# Altium PCB 2m_DBoard.PcbDoc
Units mil, origin at the board's own origin, x right, y up, seen from the top; angles counter-clockwise.
Board outline 2505 x 2750 mil, 2 copper layers (Top Layer, Bottom Layer); 23 components, 66 nets, 208 pads, 16 vias.
Unrouted connection lines stored in the file: 72.
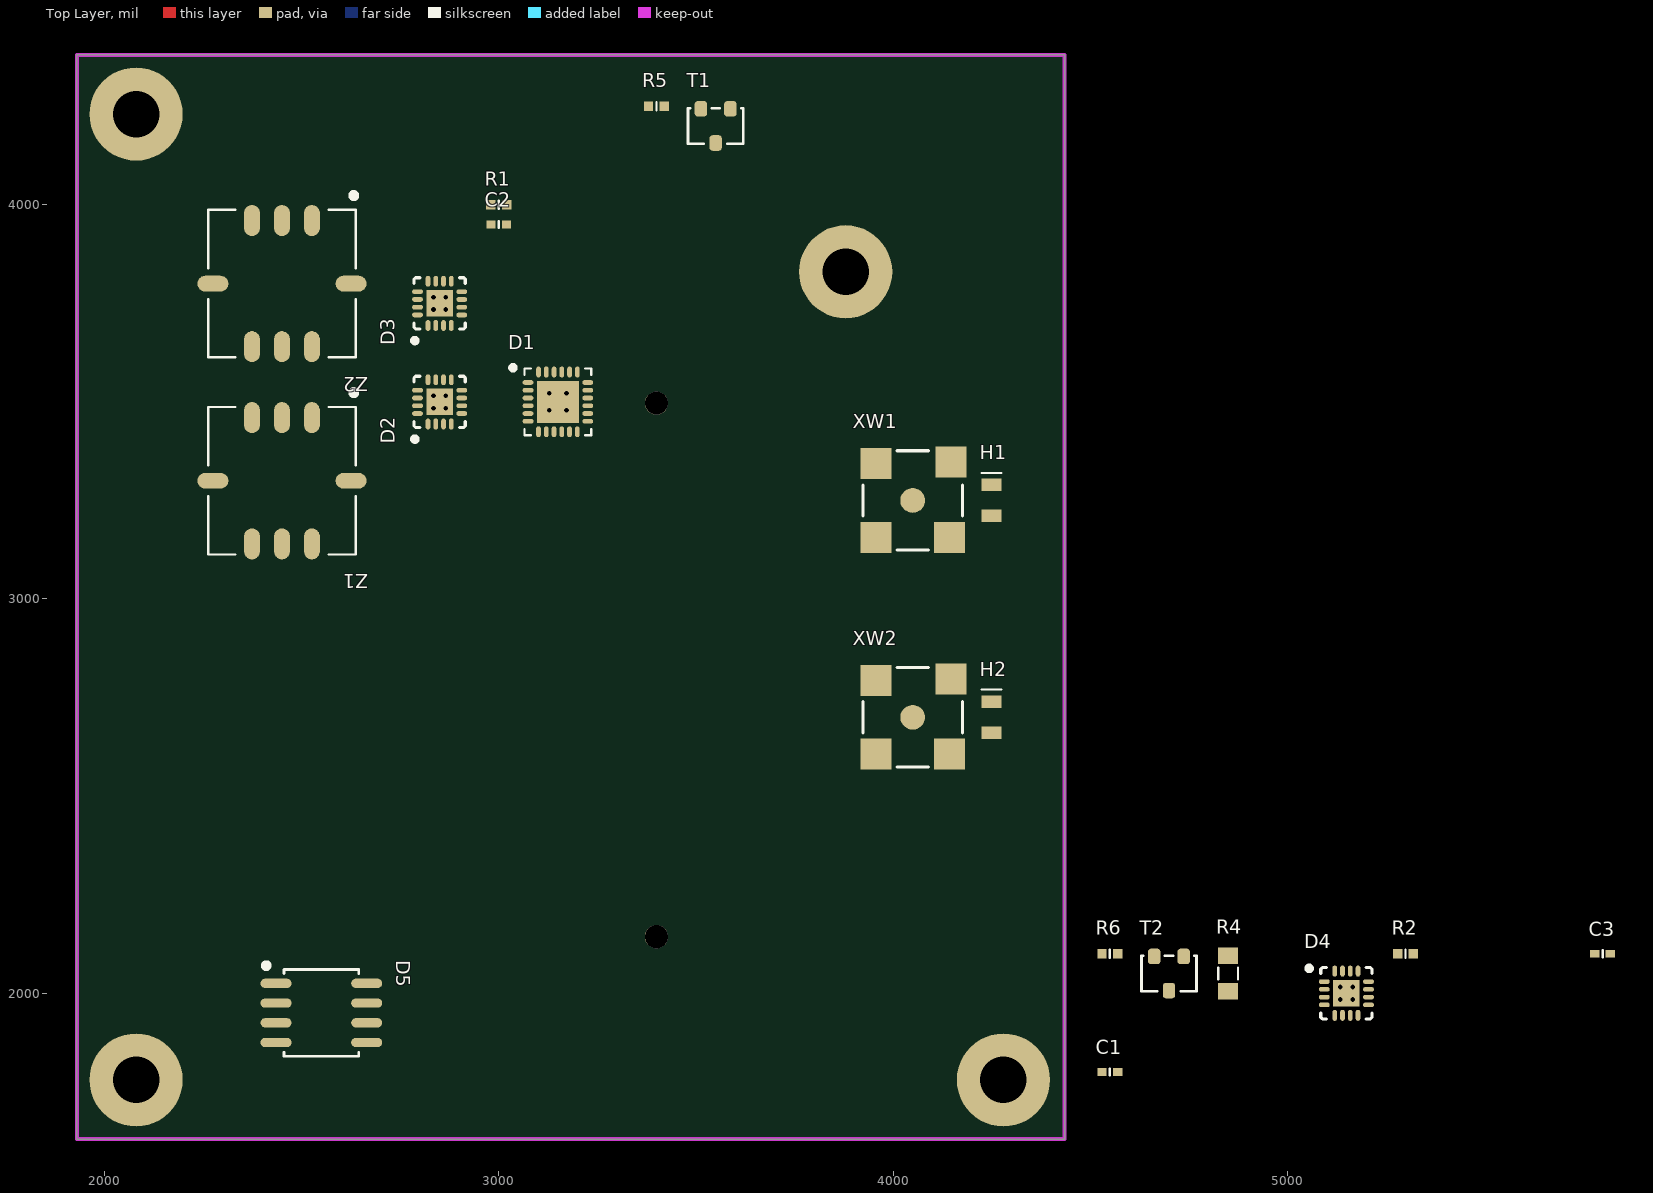
[diagram p0: Top Layer view]
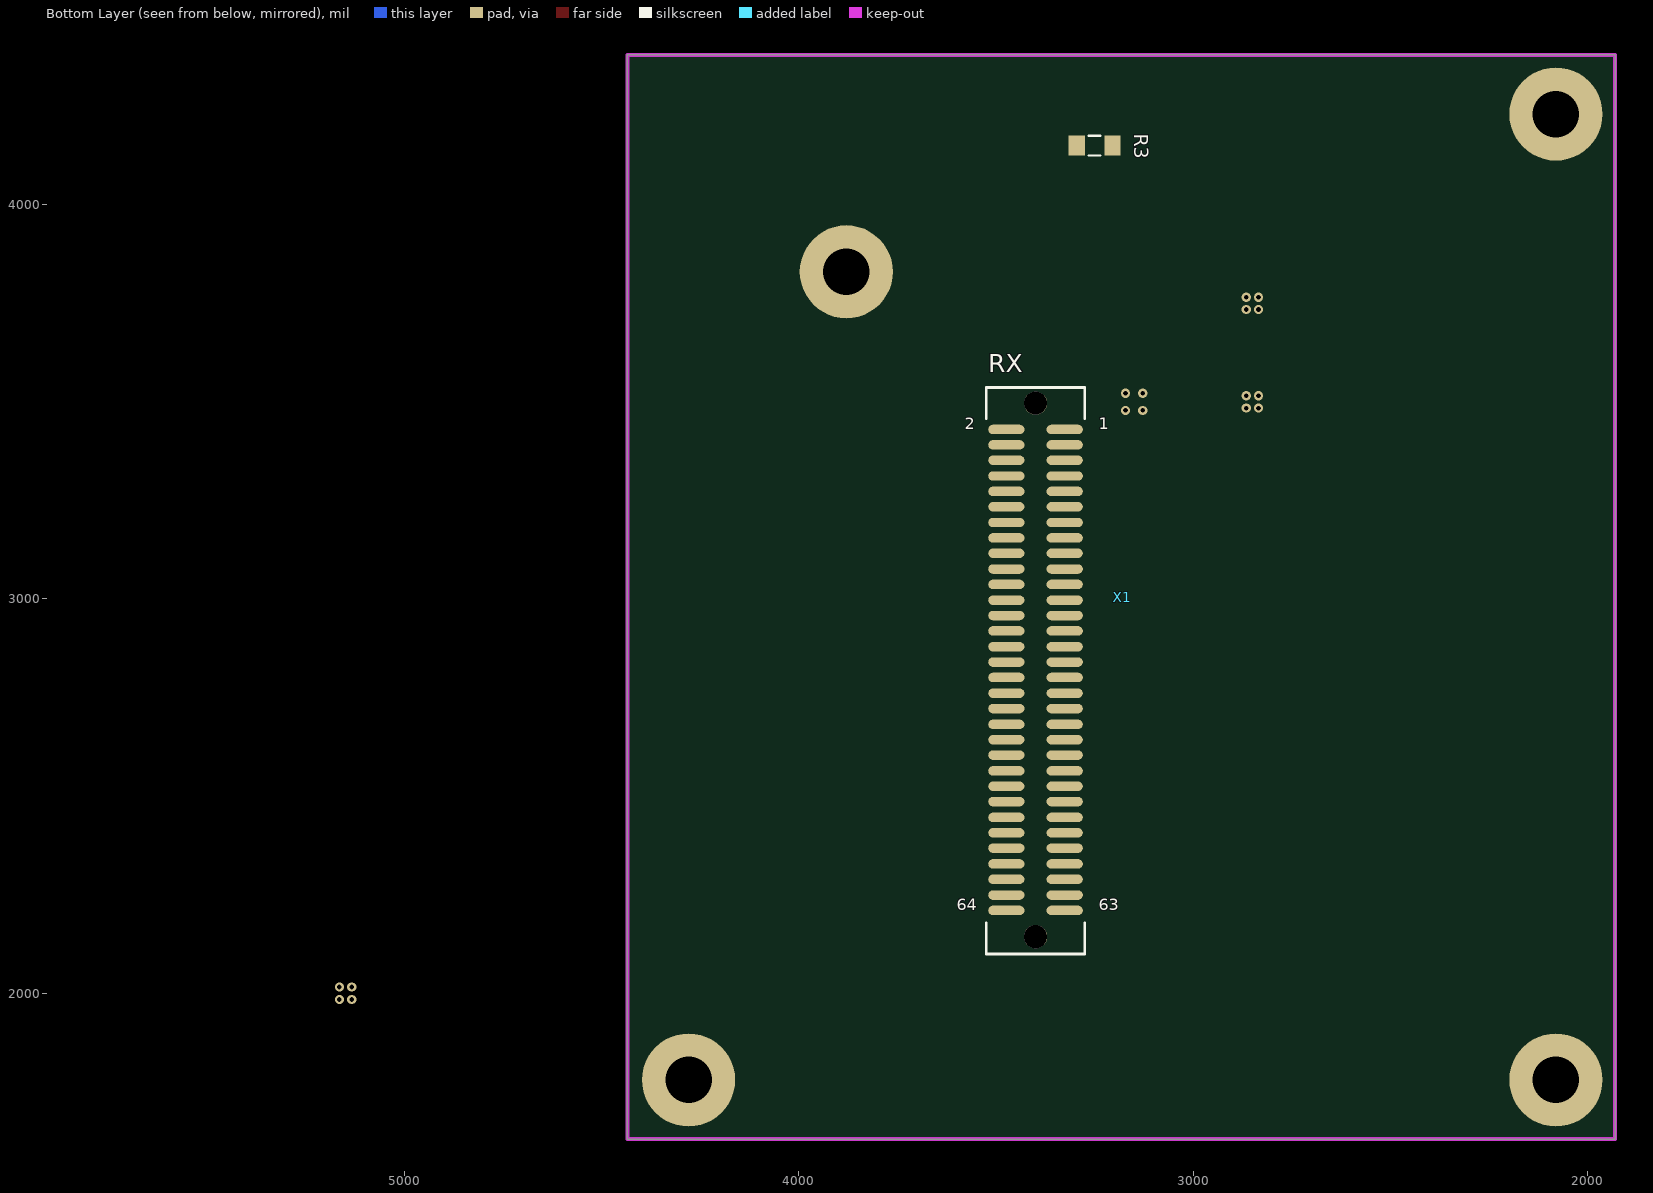
[diagram p1: Bottom Layer view, seen from below]

## Layer stack, top to bottom
Top Solder: solder mask 0.4, Solder Resist, Dk 3.5
Top Layer: signal copper 1.4
Dielectric 1: dielectric 12.6, FR-4, Dk 4.8
Bottom Layer: signal copper 1.4
Bottom Solder: solder mask 0.4, Solder Resist, Dk 3.5

## Board outline
1930,1630 4435,1630 4435,4380 1930,4380

## Design rules (kind name [scope] priority, off if disabled: settings)
Clearance [All] p1: gap=10 ignorepadtopadclearanceinfootprint=FALSE except(0: Arc-Hole Track-Hole SMDPad-Hole THPad-Hole Via-Hole Fill-Hole Poly-Hole Region-Hole Text-Hole)
DiffPairsRouting [All] p1: maxlimit=10 minlimit=10 mostfreqgap=10 toplayer_minwidth=15 toplayer_maxwidth=15 toplayer_prefwidth=15 bottomlayer_minwidth=15 bottomlayer_maxwidth=15 bottomlayer_prefwidth=15 maxuncoupledlength=500
PolygonConnect [All] p1: connectstyle=Relief reliefconductorwidth=10 reliefentries=4 polygonreliefangle="90 Angle" airgapwidth=10
RoutingVias [All] p1: holewidth=28 width=50 viastyle="Through Hole" minholewidth=28 minwidth=50 maxholewidth=28 maxwidth=50
SolderMaskExpansion [All] p1: expansion=4 istentingtop=FALSE
Width [All] p1: maxlimit=10 minlimit=10 preferedwidth=10
29 further rules are at their usual default settings.

## Classes and differential pairs
differential pair VINB: +VINB_P -VINB_N
differential pair VINA: +VINA_P -VINA_N

## Components (designator, comment, footprint, x,y, rotation, side; value= is the part's Value field where it differs from the comment)
C1 "CAP" C0402 4550,1800 r0 top
C2 "CAP" C0402 3000,3950 r0 top
C3 "CAP" C0402 5800,2100 r0 top
D1 "PE43711" QFN-24 3150,3500 r0 top
D2 "PE42553" QFN-16 2850,3500 r90 top
D3 "PE42553" QFN-16 2850,3750 r90 top
D4 "PE42553" QFN-16 5150,2000 r0 top
D5 "24LC024" SOIC_SN8 2550,1950 r0 top
H1 "RX" LED 4250,3250 r0 top
H2 "TX" LED 4250,2700 r0 top
R1 "RES" R0402 3000,4000 r0 top
R2 "RES" R0402 5300,2100 r0 top
R3 "RES" R0805 3250,4150 r180 bottom
R4 "RES" R0805 4850,2050 r90 top
R5 "RES" R0402 3400,4250 r0 top
R6 "RES" R0402 4550,2100 r0 top
T1 "2N7002" SOT-23 3550,4200 r0 top
T2 "2N7002" SOT-23 4700,2050 r0 top
X1 "DBoard" DBoard 3400,2800 r180 bottom locked
XW1 "RX" "MOLEX SD-73251-135 (Gold)" 4050,3250 r0 top
XW2 "RX2" "MOLEX SD-73251-135 (Gold)" 4050,2700 r0 top
Z1 "RBP-135+" GP731 2450,3300 r180 top
Z2 "RBP-140+" GP731 2450,3800 r180 top

## Footprints (in the part's own frame and the unit in brackets; to place one, negate y for a bottom-side part, rotate by r counter-clockwise, add the part's x,y. Pads: shape width x height; smd on the part's side, far side on the other; paste and mask are expansions set on the pad)
C0402 [mm] "Chip Capacitor, Body 1.0x0.5mm, IPC High Density"
  rect 0.6x0.5 smd: 1(-0.5,0) 2(0.5,0)
  silkscreen extent 0,-0.23 0,0.23, body extent -0.5,-0.25 0.5,0.25, height 0.49
DBoard [mil] "USRP DBoard"
  round 236.22 hole 118.11: 0(-880,-1020) 0(-480,1030) 0(1320,-1020) 0(1320,1430)
  round 59.06 hole 59.06 unplated: 0(0,-657) 0(0,697)
  oval 92x24 smd: 65(74,630) 66(-74,630) 67(74,591) 68(-74,591) 69(74,552) 70(-74,552) 71(74,512) 72(-74,512) 73(74,473) 74(-74,473) 75(74,434) 76(-74,434) 77(74,394) 78(-74,394) 79(74,355) 80(-74,355) 81(74,316) 82(-74,316) 83(74,276) 84(-74,276) 85(74,237) 86(-74,237) 87(74,197) 88(-74,197) 89(74,158) 90(-74,158) 91(74,119) 92(-74,119) 93(74,79) 94(-74,79) 95(74,40) 96(-74,40) 97(74,1) 98(-74,1) 99(74,-39) 100(-74,-39) 101(74,-78) 102(-74,-78) 103(74,-118) 104(-74,-118) 105(74,-157) 106(-74,-157) 107(74,-196) 108(-74,-196) 109(74,-236) 110(-74,-236) 111(74,-275) 112(-74,-275) 113(74,-314) 114(-74,-314) 115(74,-354) 116(-74,-354) 117(74,-393) 118(-74,-393) 119(74,-432) 120(-74,-432) 121(74,-472) 122(-74,-472) 123(74,-511) 124(-74,-511) 125(74,-551) 126(-74,-551) 127(74,-590) 128(-74,-590)
  silkscreen extent -125,-701 125,736, body extent -120,-687 120,727, height 209
GP731 [mm] "Low Pass Filter"
  oval 2x1.02 smd: GND(-4.451,0) GND(4.451,0)
  oval 1.02x2 smd: GND(-1.93,4.065) GND(-1.93,-4.065) GND(1.93,4.065) GND(1.93,-4.065) IN(0,-4.065) OUT(0,4.065)
  silkscreen extent -4.8,-5.85 4.75,4.75, body extent -4.45,-4.45 4.46,4.46, height 2.54
LED [mm] "2012"
  rect 1.3x0.8 smd: 1(0,1) 2(0,-1)
  silkscreen extent -0.64,1.78 0.64,1.78, body extent -0.62,-1 0.62,1, height 0.4
"MOLEX SD-73251-135 (Gold)" [mm]
  rect 2x2 smd: G(-2.375,-2.375) G(-2.375,2.375) G(2.375,-2.375) G(2.475,2.475)
  round 1.6 smd: S(0,0)
  silkscreen extent -3.2,-3.2 3.2,3.2, body extent -3.17,-3.17 3.18,3.18, height 9.52
QFN-16 [mm] "QFN, 16-Leads, Body 3,00x3,00mm, Pitch 0,50mm, Thermal Pad 1,70x1,70mm, IPC Medium Density"
  oval 0.7x0.3 smd: 1(-1.425,0.75) 2(-1.425,0.25) 3(-1.425,-0.25) 4(-1.425,-0.75) 9(1.425,-0.75) 10(1.425,-0.25) 11(1.425,0.25) 12(1.425,0.75)
  oval 0.3x0.7 smd: 5(-0.75,-1.425) 6(-0.25,-1.425) 7(0.25,-1.425) 8(0.75,-1.425) 13(0.75,1.425) 14(0.25,1.425) 15(-0.25,1.425) 16(-0.75,1.425)
  rect 1.7x1.7 smd: 17(0,0)
  silkscreen extent -2.53,-1.65 1.65,1.73, body extent -1.5,-1.5 1.5,1.5, height 0.92
QFN-24 [mm] "QFN, 24-Leads, Body 4,00x4,00mm, Pitch 0,50mm, Thermal Pad 2,70x2,70mm, IPC Medium Density"
  oval 0.7x0.3 smd: 1(-1.925,1.25) 2(-1.925,0.75) 3(-1.925,0.25) 4(-1.925,-0.25) 5(-1.925,-0.75) 6(-1.925,-1.25) 13(1.925,-1.25) 14(1.925,-0.75) 15(1.925,-0.25) 16(1.925,0.25) 17(1.925,0.75) 18(1.925,1.25)
  oval 0.3x0.7 smd: 7(-1.25,-1.925) 8(-0.75,-1.925) 9(-0.25,-1.925) 10(0.25,-1.925) 11(0.75,-1.925) 12(1.25,-1.925) 19(1.25,1.925) 20(0.75,1.925) 21(0.25,1.925) 22(-0.25,1.925) 23(-0.75,1.925) 24(-1.25,1.925)
  rect 2.7x2.7 smd: 25(0,0)
  silkscreen extent -3.03,-2.15 2.15,2.33, body extent -2,-2.01 2.01,2, height 0.9
R0402 [mil]
  rect 23.62x24 smd: 1(-20,0) 2(20,0)
  silkscreen extent 0,-10 0,10, body extent -20,-12 20,12, height 13
R0805 [mm]
  rect 1.05x1.3 smd: 1(-1.15,0) 2(1.15,0)
  silkscreen extent -0.38,-0.64 0.38,0.64, body extent -1.15,-0.67 1.15,0.68, height 0.76
SOIC_SN8 [mm]
  oval 2x0.6 smd: 1(-2.921,1.905) 2(-2.921,0.635) 3(-2.921,-0.635) 4(-2.921,-1.905) 5(2.921,-1.905) 6(2.921,-0.635) 7(2.921,0.635) 8(2.921,1.905)
  silkscreen extent -3.72,-2.79 2.41,3.22, body extent -3.1,-2.5 3.1,2.5, height 1.75
SOT-23 [mm]
  rrect50% 0.8x1 smd: 1(0.95,1.1) 2(-0.95,1.1) 3(0,-1.1)
  silkscreen extent -1.78,-1.14 1.78,1.14, body extent -1.5,-1.25 1.5,1.25, height 1.09

## Part data
C1 C2 C3: "SMD Capacitor"
D1: "The PE43711 is a 50?, HaRP™ technology-enhanced, 7-bit RF digital step attenuator"
D2 D3 D4: "HaRPTM technology-enhanced absorptive SPDT"
D5: "I2C EEPROM"
H1 H2: library part LED, "CHIP LED LAMP"
R1 R2 R3 R4 R5 R6: "SMD Resistor"
T1 T2: "N-Channel MOSFET 2N7002"
X1: "USRP DBoard"
XW1 XW2: library part "RF Connector", "50 Ohms, SMA Jack, Vertica"
Z1 Z2: "Bandpass Filter"

## Via types
v1: diameter 23.62, hole 11.81, Top Layer to Bottom Layer, 16 vias

## Nets (pads, with @x,y where several pads share a name; then routed paths per layer and width w, separated by ;. In a path a pad name is that pad's centre, name@x,y a point inside that pad or via, vN(x,y) a via of type N, cw(c..) or ccw(c..) an arc to the next point about the centre after c; other vN are vias at no path point)
3V3_DVDD: X1.71 X1.73 X1.85
5V_DVDD: D1.2 D2.16 D3.16 D4.16 H1.2 H2.2
6V_RX: X1.67 X1.69
20MHZ_BW: D2.2 Z1.IN
20MHZ_BW_FLTD: D3.2 Z1.OUT
30MHZ_BW: D2.11 Z2.IN
30MHZ_BW_FLTD: D3.11 Z2.OUT
_OUTA_RX: X1.117 X1.119
_OUTB_RX: X1.113 X1.115
_VIN0_RX: X1.125
_VIN1_RX: X1.123
AGND: D1.4 D1.6 D1.7 D1.8 D1.9 D1.10 D1.11 D1.12 D1.13 D1.15 D1.25 R1.2 R2.2 XW1.G XW2.G Z1.GND Z2.GND
  other v1: 3128.35,3478.35 3171.65,3478.35 3128.35,3521.65 3171.65,3521.65
AGND_RX: X1.105 X1.106 X1.111 X1.112 X1.118 X1.122 X1.127 X1.128
ATT_CLK: D1.17
ATT_D0: D1.1
ATT_D1: D1.24
ATT_D2: D1.23
ATT_D3: D1.22
ATT_D4: D1.21
ATT_D5: D1.20
ATT_D6: D1.19
ATT_LE: D1.16
ATT_P/S\: D1.3
ATT_SI: D1.18
AVDD_RX: X1.107 X1.108 X1.109 X1.110
CLOCK_RX_N: X1.75
CLOCK_RX_P: X1.77
GND: R5.2 R6.2 T1.2 T2.2 X1.65 X1.66 X1.68 X1.83 X1.101 X1.102
IF: C1.1 D4.7
IF_ATT: D1.14
IO_RX_00: X1.100
IO_RX_01: X1.98
IO_RX_02: X1.96
IO_RX_03: X1.94
IO_RX_04: X1.92
IO_RX_05: X1.90
IO_RX_06: X1.88
IO_RX_07: X1.86
IO_RX_08: X1.84
IO_RX_09: X1.82
IO_RX_10: X1.80
IO_RX_11: X1.78
IO_RX_12: X1.76
IO_RX_13: X1.74
IO_RX_14: X1.72
IO_RX_15: X1.70
NetC1_2: C1.2 D1.5
NetC2_1: C2.1 R1.1 XW1.S
NetC2_2: C2.2 D2.7
NetC3_1: C3.1 R2.1 XW2.S
NetH1_1: H1.1 R3.1
NetH2_1: H2.1 R4.1
NetR3_2: R3.2 T1.3
NetR4_2: R4.2 T2.3
RX2_LED: R6.1 T2.1
RX_LED: R5.1 T1.1
SCL: X1.79
SCLK_RX_DB: X1.93
SDA: X1.81
SDI_RX_DB: X1.97
SDO_RX_DB: X1.95
SEN_RX_DB: X1.99
VINA_N: X1.126
VINA_P: X1.124
VINB_N: X1.116
VINB_P: X1.114
pads on no net: C3.2 D2.1 D2.3 D2.4 D2.5 D2.6 D2.8 D2.9 D2.10 D2.12 D2.13 D2.14 D2.15 D2.17 D3.1 D3.3 D3.4 D3.5 D3.6 D3.7 D3.8 D3.9 D3.10 D3.12 D3.13 D3.14 D3.15 D3.17 D4.1 D4.2 D4.3 D4.4 D4.5 D4.6 D4.8 D4.9 D4.10 D4.11 D4.12 D4.13 D4.14 D4.15 D4.17 D5.1 D5.2 D5.3 D5.4 D5.5 D5.6 D5.7 D5.8 X1.0 X1.87 X1.89 X1.91 X1.103 X1.104 X1.120 X1.121
copper on no net:
  other v1: 5134.25,1984.25 5165.75,1984.25 5134.25,2015.75 5165.75,2015.75 2834.25,3484.25 2865.75,3484.25 2834.25,3515.75 2865.75,3515.75 2834.25,3734.25 2865.75,3734.25 2834.25,3765.75 2865.75,3765.75

## Keep-outs
Keep-Out Layer:
  the board outline again, w10

## Text inside footprints (layer, text, board x,y; h text height)
X1: Bottom Overlay "RX" at 3520,3560 h78.74; Bottom Overlay "1" at 3240,3420 h50; Bottom Overlay "2" at 3580,3420 h50; Bottom Overlay "63" at 3240,2200 h50; Bottom Overlay "64" at 3600,2200 h50